# Altium PCB Water_Level_Indicator_PCB.PcbDoc
Units mil, origin at the board's own origin, x right, y up, seen from the top; angles counter-clockwise.
Board outline 2600.03 x 2370.03 mil, 2 copper layers (Top Layer, Bottom Layer); 26 components, 30 nets, 72 pads, 0 vias.
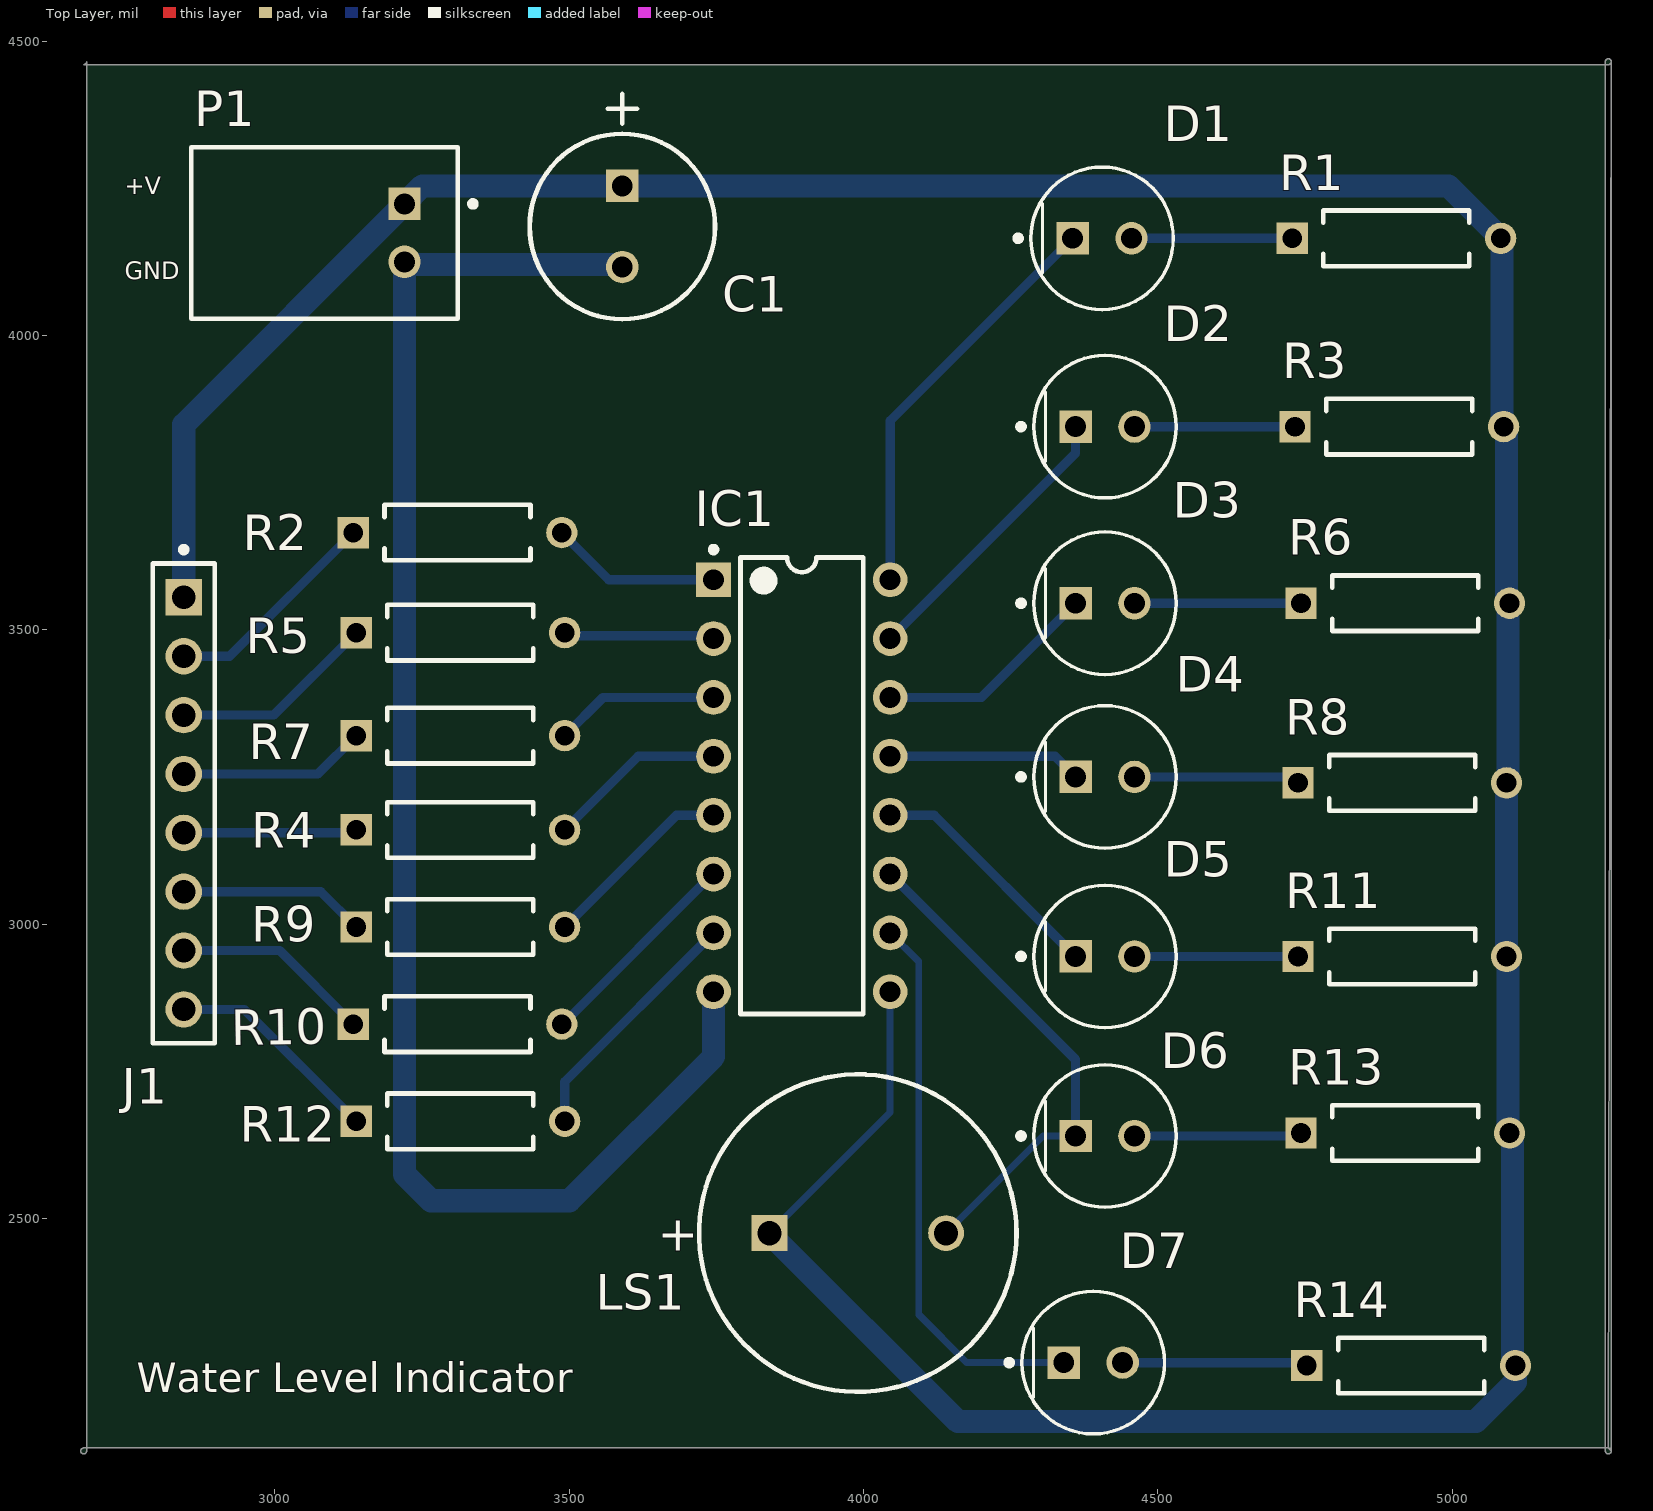
[diagram p0: Top Layer view]
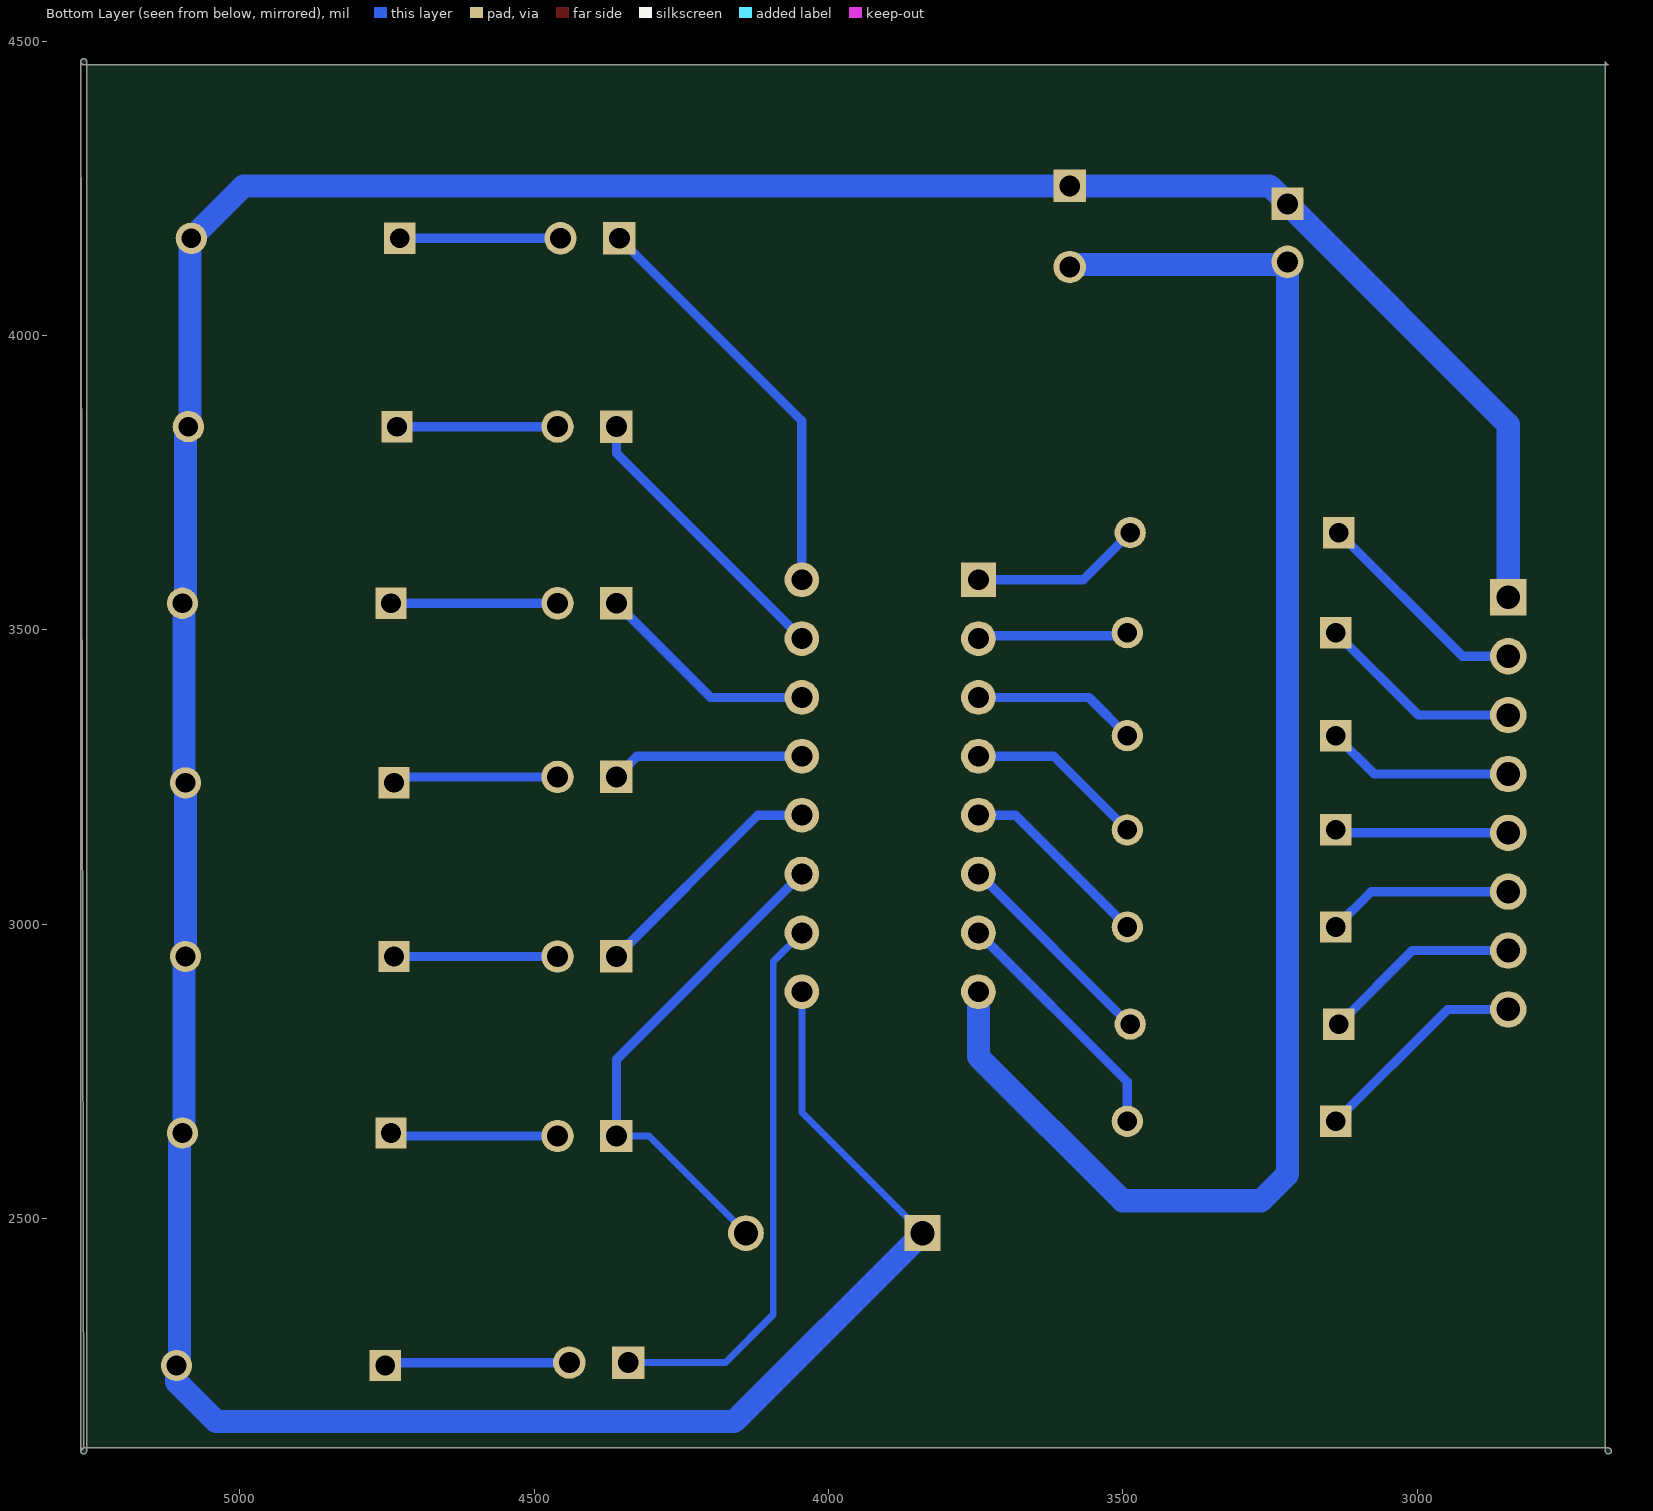
[diagram p1: Bottom Layer view, seen from below]

## Layer stack, top to bottom
Top Solder: solder mask 0.4, Solder Resist, Dk 3.5
Top Layer: signal copper 1.4
Dielectric 1: dielectric 12.6, FR-4, Dk 4.8
Bottom Layer: signal copper 1.4
Bottom Solder: solder mask 0.4, Solder Resist, Dk 3.5

## Board outline
2669.99,2105 ccw(c2675,2105) 2675,2099.99 ccw(c2675,2105) 2680.01,2105 2680.01,2110.01 2680.01,4459.98 2680.01,4464.97 cw(c2675,4465) 2675,4459.98 5265,4459.98 ccw(c5265,4465) 5270.01,4465 ccw(c5265,4465) 5265,4470.02 ccw(c5265,4465) 5259.98,4465 5259.98,4459.98 5259.98,2110.01 5259.98,2105 ccw(c5265,2105) 5265,2099.99 ccw(c5265,2105) 5270.02,2105 5270.01,4465 5265,2110.01 cw(c5265,2105) 5270.02,2105 5265,2110.01 2675,2110.01 ccw(c2675,2105)

## Design rules (kind name [scope] priority, off if disabled: settings)
Clearance [All] p1: gap=10 ignorepadtopadclearanceinfootprint=FALSE
PolygonConnect [All] p1: connectstyle=Relief reliefconductorwidth=10 reliefentries=4 polygonreliefangle="90 Angle" airgapwidth=10
RoutingVias [All] p1: holewidth=28 width=50 viastyle="Through Hole" minholewidth=28 minwidth=50 maxholewidth=28 maxwidth=50
SolderMaskExpansion [All] p1: expansion=0 istentingtop=FALSE
SupplyNets "Schematic Supply Nets_1" [InNet('GND')] p1: voltage=0.000
SupplyNets "Schematic Supply Nets" [InNet('+V')] p2: voltage=0.000
Width [All] p1: maxlimit=39.37 minlimit=9.84 preferedwidth=11.81 minimp=50.000000 maximp=50.000000 favimp=50.000000
30 further rules are at their usual default settings.

## Components (designator, comment, footprint, x,y, rotation, side; value= is the part's Value field where it differs from the comment)
C1 "ECA1HM101" CAPPR65-350-1150X800X1250 3590,4185 r270 top value=100µF
D1 "XLUR12D" FP-XLUR12D-MFG 4405,4165 r0 top
D2 "XLUR12D" FP-XLUR12D-MFG 4410,3845 r0 top
D3 "XLUR12D" FP-XLUR12D-MFG 4410,3545 r0 top
D4 "XLUR12D" FP-XLUR12D-MFG 4410,3250 r0 top
D5 "XLUR12D" FP-XLUR12D-MFG 4410,2945 r0 top
D6 "XLUR12D" FP-XLUR12D-MFG 4410,2640 r0 top
D7 "XLUR12D" FP-XLUR12D-MFG 4390,2255 r0 top
IC1 "ULN2003A" STM-DIP-16L 3895,3235 r0 top
J1 "TSW-108-08-G-S" FP-TSW-108-08-G-S-MFG 2845,3205 r270 top
LS1 "KPEG242" KINGS-KPEG242-2 3990,2475 r0 top
P1 "S2B-XH-A(LF)(SN)" JST-S2B-XH-A(LF)(SN)_V 3220,4174.21 r270 top
R1 "MFR-25FBF52-221R" RESA60-630X240 4905,4165 r0 top value=221
R2 "MFR-25FBF52-475R" RESA60-630X240 3310,3665 r0 top value=475
R3 "MFR-25FBF52-221R" RESA60-630X240 4910,3845 r0 top value=221
R4 "MFR-25FBF52-475R" RESA60-630X240 3315,3495 r0 top value=475
R5 "MFR-25FBF52-475R" RESA60-630X240 3315,3320 r0 top value=475
R6 "MFR-25FBF52-221R" RESA60-630X240 4920,3545 r0 top value=221
R7 "MFR-25FBF52-475R" RESA60-630X240 3315,3160 r0 top value=475
R8 "MFR-25FBF52-221R" RESA60-630X240 4915,3240 r0 top value=221
R9 "MFR-25FBF52-475R" RESA60-630X240 3315,2995 r0 top value=475
R10 "MFR-25FBF52-475R" RESA60-630X240 3310,2830 r0 top value=475
R11 "MFR-25FBF52-221R" RESA60-630X240 4915,2945 r0 top value=221
R12 "MFR-25FBF52-475R" RESA60-630X240 3315,2665 r0 top value=475
R13 "MFR-25FBF52-221R" RESA60-630X240 4920,2645 r0 top value=221
R14 "MFR-25FBF52-221R" RESA60-630X240 4930,2250 r0 top value=221

## Footprints (in the part's own frame and the unit in brackets; to place one, negate y for a bottom-side part, rotate by r counter-clockwise, add the part's x,y. Pads: shape width x height; smd on the part's side, far side on the other; paste and mask are expansions set on the pad)
CAPPR65-350-1150X800X1250 [mm] "THD, 2-Leads, Dia 8mm, Pin Spacing 3.5mm"
  rect 1.4x1.4 hole 0.9: 1(-1.75,0)
  round 1.4 hole 0.9: 2(1.75,0)
  silkscreen extent -5.71,-4 4,4, body extent -4,-4 3.95,4, height 12.5
FP-TSW-108-08-G-S-MFG [mm]
  rect 1.57x1.57 hole 1.02 paste-2539.97 mask+0: 1(-8.89,0)
  round 1.57 hole 1.02 paste-2539.97 mask+0: 2(-6.35,0) 3(-3.81,0) 4(-1.27,0) 5(1.27,0) 6(3.81,0) 7(6.35,0) 8(8.89,0)
  silkscreen extent -11.07,-1.34 10.35,1.34, body extent -10.45,-1.44 10.45,1.44, height 0.25
FP-XLUR12D-MFG [mm]
  rect 1.4x1.4 hole 0.9 paste-2539.97 mask+0: 1(-1.27,0)
  round 1.4 hole 0.9 paste-2539.97 mask+0: 2(1.27,0)
  silkscreen extent -3.75,-3.08 3.08,3.08, body extent -3.17,-3.17 3.17,3.17, height 0.25
JST-S2B-XH-A(LF)(SN)_V [mm] "Header, 2-Leads, Body 7.4x11.5mm, Pitch 2.5mm"
  rect 1.4x1.4 hole 0.9: 1(-1.25,0)
  round 1.4 hole 0.9: 2(1.25,0)
  silkscreen extent -3.7,-9.2 3.7,3.08, body extent -3.7,-9.2 3.7,2.3, height 5.95
KINGS-KPEG242-2 [mm] "THD, 2-Leads, Dia 13.7mm, Pitch 7.62mm"
  rect 1.55x1.55 hole 1.05: 1(-3.81,0)
  round 1.55 hole 1.05: 2(3.81,0)
  silkscreen extent -6.85,-6.85 6.85,6.85, body extent -6.85,-6.85 6.85,6.85, height 7.6
RESA60-630X240 [mm] "Axial Resistor, 2-Leads, Dia 2.4mm, Body Length 6.3mm"
  rect 1.35x1.35 hole 0.85: 1(-4.5,0)
  round 1.35 hole 0.85: 2(4.5,0)
  silkscreen extent -3.15,-1.2 3.15,1.2, body extent -4.77,-1.19 4.77,1.2, height 2.4
STM-DIP-16L [mm] "DIP, 16-Leads, Body 19.7x7.1mm, Pitch 2.54mm"
  rect 1.5x1.5 hole 0.9: 1(-3.81,8.89)
  round 1.5 hole 0.9: 2(-3.81,6.35) 3(-3.81,3.81) 4(-3.81,1.27) 5(-3.81,-1.27) 6(-3.81,-3.81) 7(-3.81,-6.35) 8(-3.81,-8.89) 9(3.81,-8.89) 10(3.81,-6.35) 11(3.81,-3.81) 12(3.81,-1.27) 13(3.81,1.27) 14(3.81,3.81) 15(3.81,6.35) 16(3.81,8.89)
  silkscreen extent -3.93,-9.85 2.65,10.31, body extent -3.95,-9.85 3.95,9.85, height 5.33

## Part data
C1: library part CMP-001-00026-7, "Aluminum Electrolytic Capacitor, 100 uF, +/- 20%, 50 V, -40 to 85 degC, 2-Pin THD, RoHS, Bulk", Capacitor Type=Electrolytic, Case/Package=Radial, Manufacturer=Panasonic, Max Operating Temperature=85°C, Min Operating Temperature=-40°C, Package Description="2-Pin Radial Lead, Dia 8 mm, Height 12.5 mm", Package Quantity=200, Package Reference=CAPPR65-350-1150X800X1250, Ripple Current=250mA, Tolerance=20%, Voltage Rating=50V, Datasheet URL=https://industrial.panasonic.com/cdbs/www-data/pdf/RDF0000/ABA0000C1218.pdf, Datasheet Version="Rev. 05, 10/2016", Diameter=8mm, Lead Pitch=3.5mm, Manufacturer URL=http://www.panasonic.com/, Mounting Technology=TH, Packaging=Bulk, Pins=2, Ripple Current (AC)=250mA, RoHS Compliant=True
D1 D2 D3 D4 D5 D6 D7: library part CMP-02085-08376351-1, "627nm Red LED; 5x8.6mm, Through-Hole Mount with Red Diffused Round Lamp", Case/Package=Radial, Color=Red, Forward Voltage=1.9V, Test Current=10mA, Dominant Wavelength=617nm, Height=8.6mm, Lens Color=Red, Lens Transparency=Diffused, Lifecycle Status=Production, Luminous Intensity=39mcd, Mount="Through Hole", RoHS=Compliant, Viewing Angle=30°, Wavelength=627nm
IC1: library part CMP-2000-07351-1, "Seven Darlington Array, 50 V, 0.5 A, -40 to 85 degC, 16-Pin DIP, RoHS, Tube", Collector Emitter Voltage V(br)ceo=50V, DC Collector Current=500mA, DC Current Gain hFE=1000hFE, Manufacturer=STMicroelectronics, Operating Temperature Max=85°C, Output Current=0.5A, Package Description="16-Pin DIP, Body 19.7 x 7.1 mm, Pitch 2.54 mm", Package Reference=DIP-16L, Power Dissipation Pd=-, Transistor Case Style=DIP, Automotive Qualification Standard=-, Datasheet URL=http://www2.st.com/content/ccc/resource/technical/document/datasheet/f3/6e/c8/64/4d/b3/4e/38/CD00001244.pdf/files/CD00001244.pdf/jcr:content/translations/en.CD00001244.pdf, Datasheet Version="Rev. 8, 06/2012", Manufacturer URL=http://www.st.com/, Mounting Technology=ThroughHole, MSL=MSL2-1year, No. of Pins=16Pins, PartNumber=ULN2003A, Product Range=-, SVHC=NoSVHC(17-Dec-2015), Transistor Polarity=NPN, VOUT=50V
J1: library part CMP-02766-000001-1, "CONN HEADER VERT 8POS 2.54MM", Manufacturer=Samtec, Temperature="-55°C to +125°C", Temperature Range High=+125°C, Temperature Range Low=-55°C, Automotive=No, Category=Conn, ComponentLink2Description=Datasheet, ComponentLink2URL=http://suddendocs.samtec.com/catalog_english/tsw_th.pdf, Conn Gender=Male, Conn Orientation=Straight, Contact Material=Gold,Nickel, Device Class L1=Connectors, Device Class L2="Headers and Wire Housings", Device Class L3=unset, Digikey Description="CONN HEADER VERT 8POS 2.54MM", Footprint Url=http://suddendocs.samtec.com/prints/tsw-xxx-xx-x-x-xx-xxx-footprint.pdf, Height=8.71mm, Lead Free=Yes, Manufacturer Part Number=TSW-108-08-G-S, Mouser Description="TSW - Samtec 2.54mm Pin Header 13.46mm Overall Pin Length 5.08mm Tail", Number Of Contacts=8, Number Of Rows=1, Octopart=https://octopart.com/tsw-108-08-g-s-samtec-272653, Package=TSW-108-08-G-S, Pitch=2.54mm, RoHS=TRUE
LS1: library part CMP-2000-06518-1, "Piezo Indicator, 4100 Hz, 3 to 16 V, -20 to 70 degC, 2-Pin THD, RoHS", Current - Max=7A, Frequency Range=3600to4600Hz, Manufacturer=KingstateElectronicsCorp., Maximum Resonant Frequency=4600Hz, Maximum Supply Current=7mA, Operating Temperature=-20to70°C, Package Description="2-Pin Through Hole Device, Body Dia 13.7 mm, Pitch 7.62 mm", PartNumber=KPE-242, Typical Operating Supply Voltage=12Vdc, Category=AudioIndicatorsandAlerts, Datasheet URL=https://datasheet.ciiva.com/11776/0900766b8068f3a2-11776713.pdf, Datasheet Version=01/2006, Manufacturer URL=http://www.kingstate.com.tw/index.php/en/, Minimum Sound Pressure=70dBA, Mounting=ThroughHole, Mounting Technology=ThroughHole, Package Reference=KPEG242, Product Diameter=13.7mm, Product Height=7.6mm, Technology=Piezo, Termination Method=Pin, Tone Mode=Continuous, Type=Indicator
P1: library part CMP-002-00032-2, "Male Header, Pitch 2.5 mm, 1 x 2 Position, Height 6.1 mm, Tail Length 3.4 mm, -25 to 85 degC, RoHS, Bulk", Manufacturer=JST, Max Operating Temperature=85°C, Min Operating Temperature=-25°C, Package Description="XH Series Disconnectable Crimp Style Connector, Pitch 2.5 mm, 1 x 2 Position, Height 6.1 mm, Tail Length 3.4 mm", Case/Package=S2B-XH-A(LF)(SN), Connector Type=Header, Datasheet URL=http://www.jst-mfg.com/product/pdf/eng/eXH.pdf, Datasheet Version=May-16, Gender=Male, Manufacturer URL=http://www.jst.com/home2.html, Mounting Technology=TH, Package Reference=S2B-XH-A(LF)(SN), RoHS Compliant=Unknown
R1 R3 R6 R8 R11 R13 R14: library part CMP-009-00051-4, "Axial Resistor, 221 Ohm, +/- 1%, 250 mW, -55 to 155 degC, 2-Pin THD, RoHS, Bulk", Case/Package=Axial, Manufacturer=Yageo, Max Operating Temperature=155°C, Min Operating Temperature=-55°C, Package Description="2-Pin Axial Lead, Dia 2.4 mm, Body Length 6.3 mm", Package Quantity=200, Package Reference=MFR-25, Power=250mW, Tolerance=1%, Voltage Rating=250V, Datasheet URL=http://www.yageo.com/documents/recent/Yageo%20LR_MFR_2013.pdf, Datasheet Version=Apr-13, Manufacturer URL=http://www.yageo.com/, Mounting Technology=TH, Packaging=Bulk, RoHS Compliant=True
R2 R4 R5 R7 R9 R10 R12: library part CMP-009-00056-4, "Axial Resistor, 475 Ohm, +/- 1%, 0.25 W, -55 to 155 degC, 2-Pin THD, RoHS, Bulk", Case/Package=Axial, Manufacturer=Yageo, Max Operating Temperature=155°C, Min Operating Temperature=-55°C, Package Description="2-Pin Axial Lead, Dia 2.4 mm, Body Length 6.3 mm", Package Quantity=200, Package Reference=MFR-25, Power=250mW, Tolerance=1%, Voltage Rating=250V, Datasheet URL=http://www.yageo.com/documents/recent/Yageo%20LR_MFR_2013.pdf, Datasheet Version=Apr-13, Manufacturer URL=http://www.yageo.com/, Mounting Technology=TH, Packaging=Bulk, RoHS Compliant=True

## Nets (pads, with @x,y where several pads share a name; then routed paths per layer and width w, separated by ;. In a path a pad name is that pad's centre, name@x,y a point inside that pad or via, vN(x,y) a via of type N, cw(c..) or ccw(c..) an arc to the next point about the centre after c; other vN are vias at no path point)
+V: C1.1 IC1.9 J1.1 LS1.1 P1.1 R1.2 R3.2 R6.2 R8.2 R11.2 R13.2 R14.2 | length 6615.1
  Bottom Layer w11.81: LS1.1 4045,2680 IC1.9
  Bottom Layer w39.37: J1.1 2845,3848.43 P1.1 3250.47,4253.9 C1.1 4993.27,4253.9 R1.2 5084.67,4162.5 5084.67,3847.5 R3.2 5092.17,3840 5092.17,3550 R6.2 5094.67,3542.5 5094.67,3242.5 R8.2 R11.2 5094.67,2942.5 5094.67,2647.5 R13.2 5102.17,2640 5102.17,2255 R14.2 5107.08,2249.91 5107.08,2222.08 5040,2155 4160,2155 LS1.1
GND: C1.2 IC1.8 P1.2 | length 2678.8
  Bottom Layer w39.37: C1.2 3585.55,4120.55 3224.45,4120.55 P1.2 3220,2575 3265,2530 3500,2530 3745,2775 IC1.8
NetD1_1: D1.1 IC1.16 | length 708.4
  Bottom Layer w15.75: IC1.16 4045,3855 D1.1
NetD1_2: D1.2 R1.1 | length 272.8
  Bottom Layer w15.75: D1.2 R1.1
NetD2_1: D2.1 IC1.15 | length 490.5
  Bottom Layer w15.75: IC1.15 4360,3800 D2.1
NetD2_2: D2.2 R3.1 | length 272.8
  Bottom Layer w15.75: D2.2 R3.1
NetD3_1: D3.1 IC1.14 | length 381.3
  Bottom Layer w15.75: IC1.14 4200,3385 D3.1
NetD3_2: D3.2 R6.1 | length 282.8
  Bottom Layer w15.75: D3.2 R6.1
NetD4_1: D4.1 IC1.13 | length 329.5
  Bottom Layer w15.75: IC1.13 4325,3285 D4.1
NetD4_2: D4.2 R8.1 | length 282
  Bottom Layer w15.75: D4.2 4727.83,3250 R8.1
NetD5_1: D5.1 IC1.12 | length 414.4
  Bottom Layer w15.75: IC1.12 4120,3185 D5.1
NetD5_2: D5.2 R11.1 | length 277.8
  Bottom Layer w15.75: D5.2 R11.1
NetD6_1: D6.1 IC1.11 LS1.2 | length 863.8
  Bottom Layer w11.81: LS1.2 4305,2640 D6.1
  Bottom Layer w15.75: IC1.11 4360,2770 D6.1
NetD6_2: D6.2 R13.1 | length 284.9
  Bottom Layer w15.75: D6.2 4737.83,2640 R13.1
NetD7_1: D7.1 IC1.10 | length 948.8
  Bottom Layer w11.81: IC1.10 4093.58,2936.42 4093.58,2336.42 4175,2255 D7.1
NetD7_2: D7.2 R14.1 | length 314.9
  Bottom Layer w15.75: D7.2 4747.83,2255 R14.1
NetIC1_1: IC1.1 R2.2 | length 291
  Bottom Layer w15.75: R2.2 3567.17,3585 IC1.1
NetIC1_2: IC1.2 R4.2 | length 257
  Bottom Layer w15.75: R4.2 3497.17,3490 3740,3490 IC1.2
NetIC1_3: IC1.3 R5.2 | length 279.8
  Bottom Layer w15.75: R5.2 3557.17,3385 IC1.3
NetIC1_4: IC1.4 R7.2 | length 304.6
  Bottom Layer w15.75: R7.2 3617.17,3285 IC1.4
NetIC1_5: IC1.5 R9.2 | length 331.5
  Bottom Layer w15.75: R9.2 3682.17,3185 IC1.5
NetIC1_6: IC1.6 R10.2 | length 363.5
  Bottom Layer w15.75: R10.2 3488.58,2830 3743.58,3085 IC1.6
NetIC1_7: IC1.7 R12.2 | length 424.7
  Bottom Layer w15.75: R12.2 3492.17,2732.17 IC1.7
NetJ1_2: J1.2 R2.1 | length 374.8
  Bottom Layer w15.75: J1.2 2922.83,3455 R2.1
NetJ1_3: J1.3 R4.1 | length 350.8
  Bottom Layer w15.75: J1.3 2997.83,3355 R4.1
NetJ1_4: J1.4 R5.1 | length 319.8
  Bottom Layer w15.75: J1.4 3072.83,3255 R5.1
NetJ1_5: J1.5 R7.1 | length 294.9
  Bottom Layer w15.75: J1.5 3132.83,3155 R7.1
NetJ1_6: J1.6 R9.1 | length 317.7
  Bottom Layer w15.75: J1.6 3077.83,3055 R9.1
NetJ1_7: J1.7 R10.1 | length 339.6
  Bottom Layer w15.75: J1.7 3007.83,2955 R10.1
NetJ1_8: J1.8 R12.1 | length 371.5
  Bottom Layer w15.75: J1.8 2947.83,2855 R12.1

## Silkscreen, mask and mechanical layers (free items; w line width, h text height)
Top Overlay:
  text "+V" at 2745,4240 h30
  text "GND" at 2745,4095 h30
  text "Water Level Indicator" at 2765,2205 h50
Mechanical 1:
  lines w10: 2675,4465 2675,4465 ; 2675,4465 5265,4465 5265,2105 2675,2105 2675,4465

## Text inside footprints (layer, text, board x,y; h text height)
LS1: Top Overlay "+" at 3650,2445 h60